# Altium PCB Keyboard_IDC_I2C.PcbDoc
Units mm, origin at the board's own origin, x right, y up, seen from the top; angles counter-clockwise.
Board outline 38.4 x 34.8 mm, 2 copper layers (Top Layer, Bottom Layer); 28 components, 25 nets, 92 pads, 63 vias.
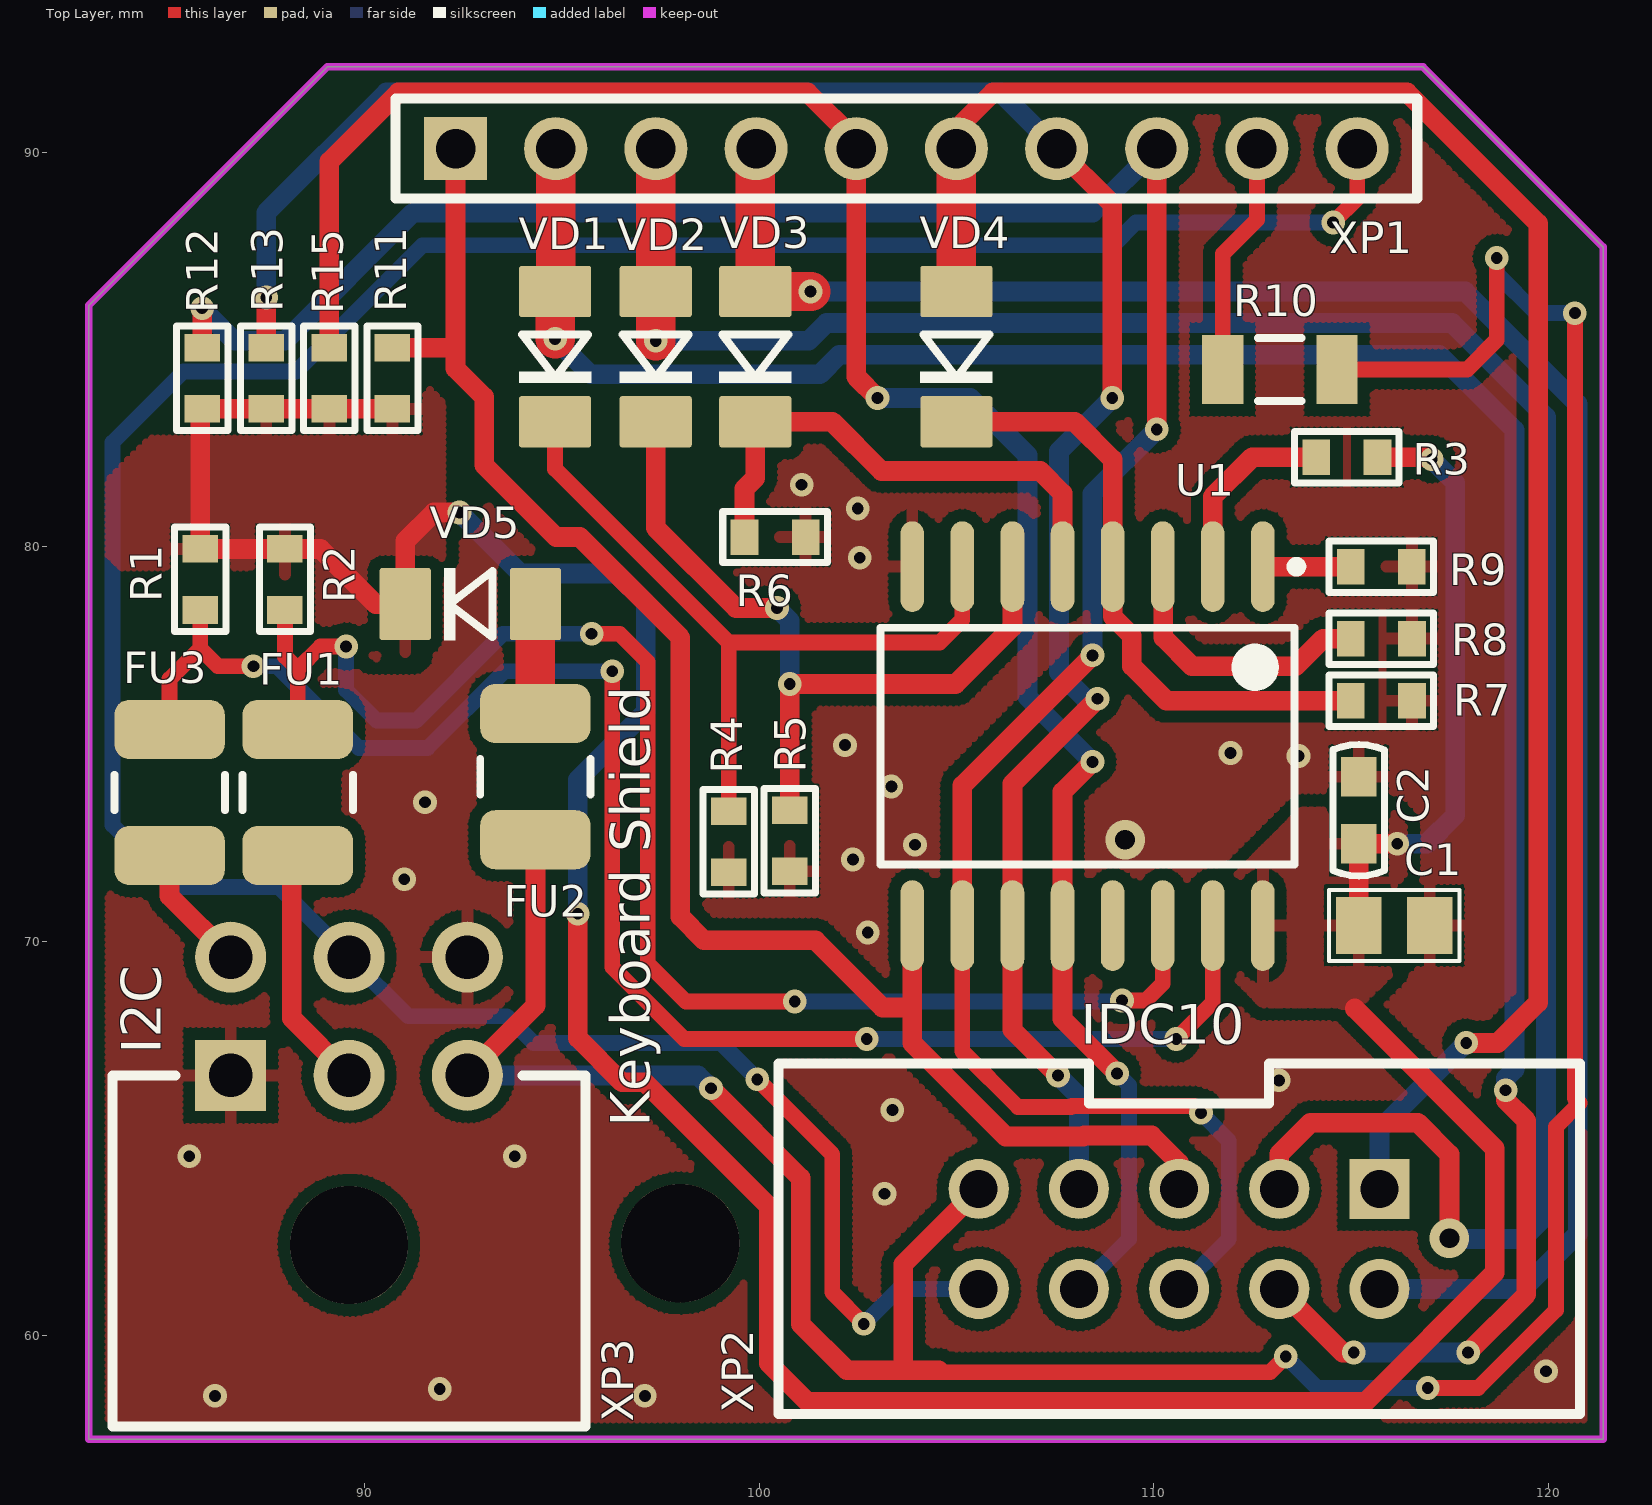
[diagram p0: Top Layer view]
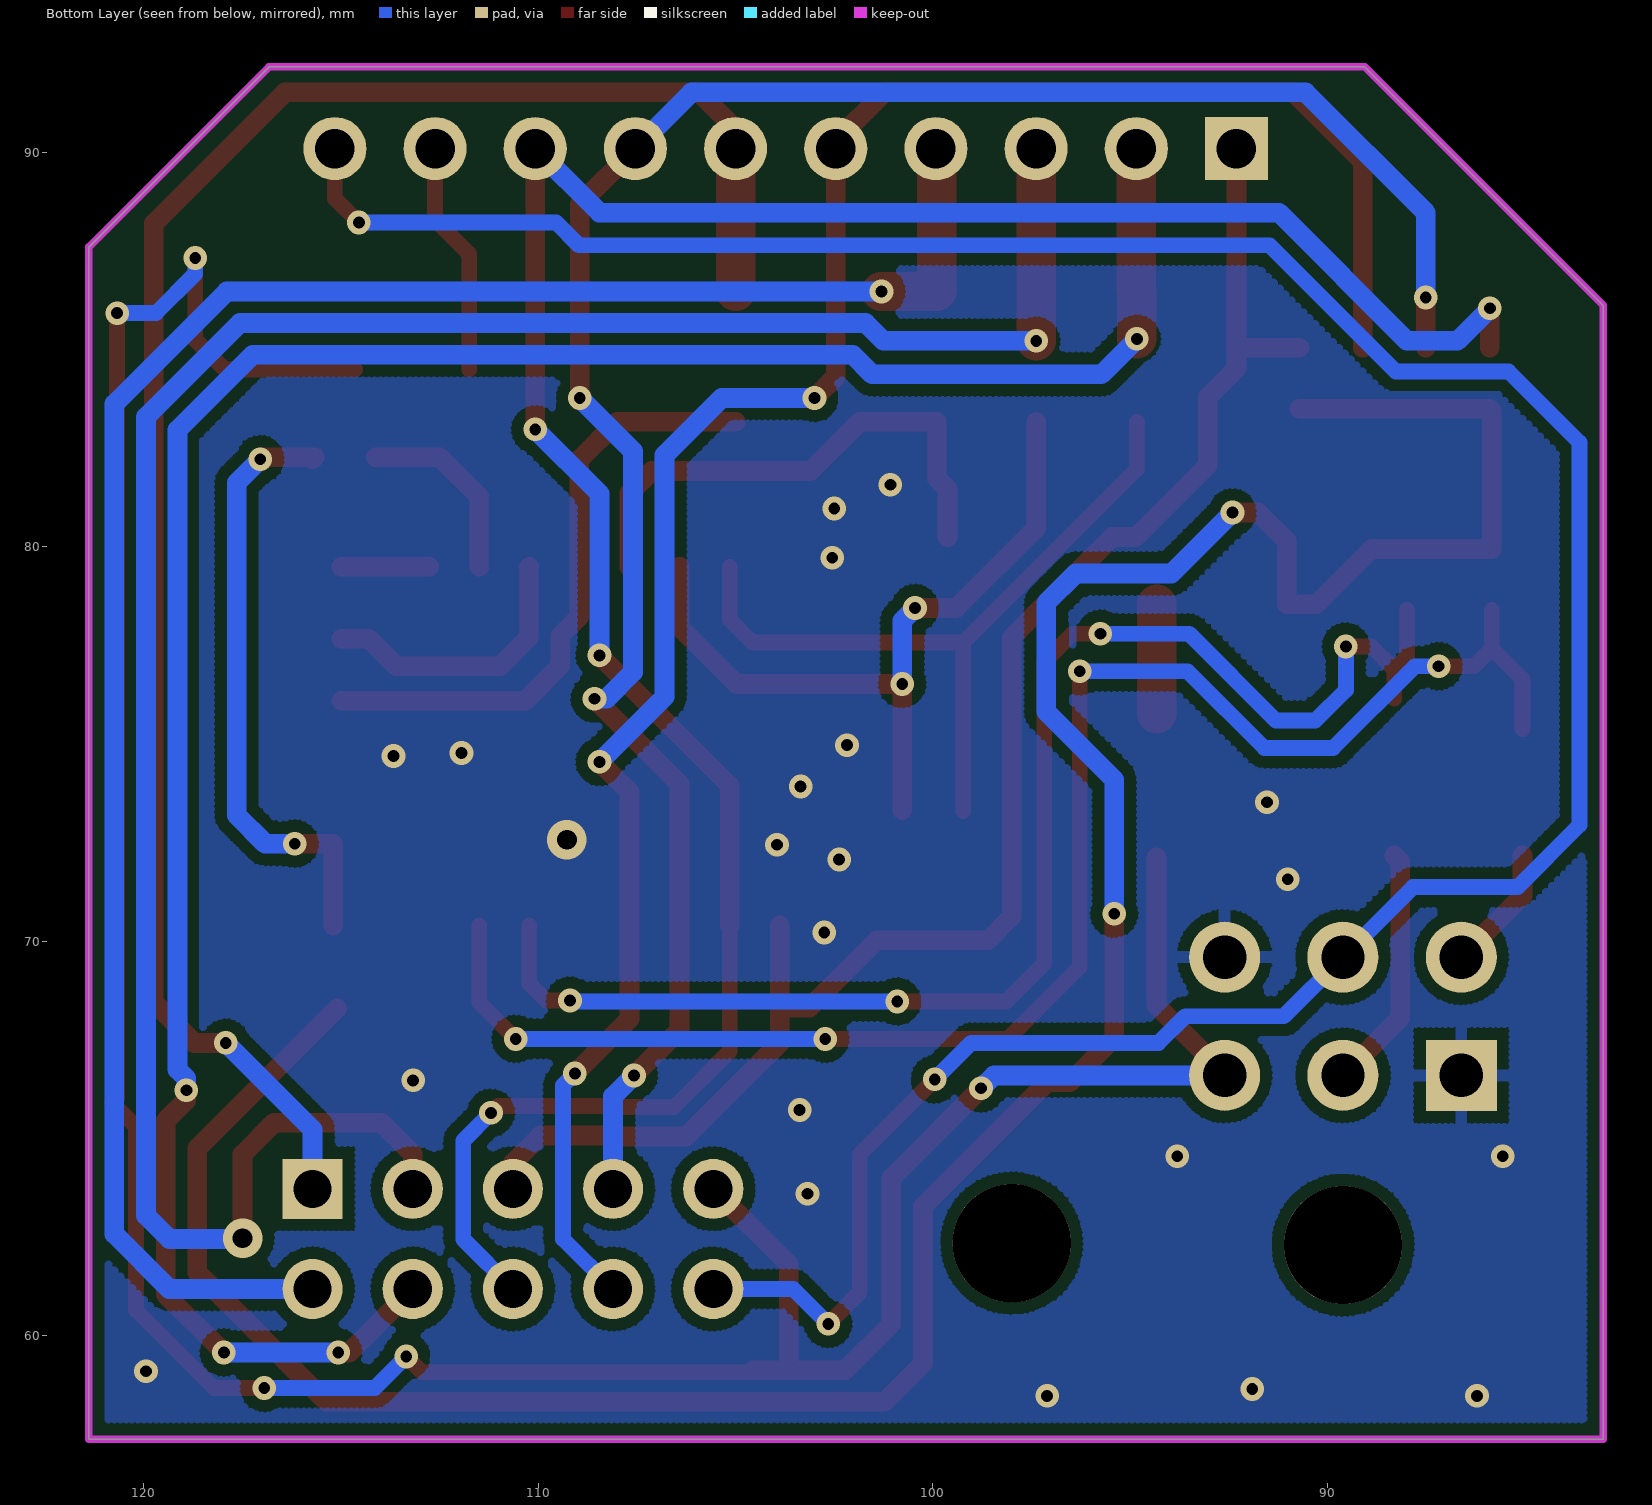
[diagram p1: Bottom Layer view, seen from below]

## Layer stack, top to bottom
Top Solder: solder mask 0.0102, Solder Resist, Dk 3.5
Top Layer: signal copper 0.0356
Dielectric 1: dielectric 0.32, FR-4, Dk 4.8
Bottom Layer: signal copper 0.0356
Bottom Solder: solder mask 0.0102, Solder Resist, Dk 3.5

## Board outline
83,57.375 83,86.125 89.05,92.175 116.825,92.175 121.4,87.6 121.4,57.375

## Design rules (kind name [scope] priority, off if disabled: settings)
Clearance [All] p1: gap=0.3 ignorepadtopadclearanceinfootprint=FALSE
HoleSize [All] p1: absolutevalues=TRUE maxlimit=10 minlimit=0.025 maxpercent=80.000 minpercent=20.000
PolygonConnect PolygonConnect_1 [All] p1: thpad.connectstyle=Relief thpad.reliefconductorwidth=0.3 thpad.reliefentries=4 thpad.polygonreliefangle="90 Angle" thpad.airgapwidth=0.3 smdpad.connectstyle=Relief smdpad.reliefconductorwidth=0.3 smdpad.reliefentries=4 smdpad.polygonreliefangle="90 Angle" smdpad.airgapwidth=0.3 via.connectstyle=Direct via.reliefconductorwidth=0.254 via.reliefentries=4 via.polygonreliefangle="90 Angle" via.airgapwidth=0.254
PolygonConnect [All] p2: connectstyle=Relief reliefconductorwidth=0.3 reliefentries=4 polygonreliefangle="90 Angle" airgapwidth=0.3
RoutingVias [All] p1: holewidth=0.4 width=0.8 viastyle="Through Hole" minholewidth=0.3 minwidth=0.6 maxholewidth=0.5 maxwidth=1
SolderMaskExpansion [All] p1: expansion=0.102
Width [All] p1: maxlimit=5 minlimit=0.2 preferedwidth=0.5
29 further rules are at their usual default settings.

## Components (designator, comment, footprint, x,y, rotation, side; value= is the part's Value field where it differs from the comment)
C1 "10uFx10V" CC0805 116.1,70.4 r180 top
C2 "0.1uF" CC0603 115.2,73.325 r270 top
FU1 "MICROSMD010F-2" RC1210 88.3,73.775 r90 top
FU2 "MICROSMD010F-2" RC1210 94.325,74.175 r90 top
FU3 "MICROSMD010F-2" RC1210 85.05,73.775 r90 top
R1 "n.p" RC0603 85.825,79.175 r90 top
R2 "n.p" RC0603 87.975,79.175 r90 top
R3 "10k" RC0603 114.9,82.275 r180 top
R4 "10k" RC0603 99.225,72.525 r90 top
R5 "10k" RC0603 100.775,72.55 r90 top
R6 "10k" RC0603 100.4,80.25 r180 top
R7 "10k" RC0603 115.775,76.1 r180 top
R8 "0E" RC0603 115.776,77.675 r0 top
R9 "0E" RC0603 115.775,79.5 r0 top
R10 "100E" RC1206 113.2,84.5 r0 top
R11 "10k" RC0603 90.7,84.275 r270 top
R12 "10k" RC0603 85.875,84.275 r270 top
R13 "10k" RC0603 87.5,84.275 r270 top
R15 "10k" RC0603 89.1,84.275 r270 top
U1 "PCF8574ADWR" DW16_N 108.325,74.95 r270 top
VD1 "LL4148" SOD-80 94.825,84.825 r90 top
VD2 "LL4148" SOD-80 97.375,84.825 r90 top
VD3 "LL4148" SOD-80 99.9,84.825 r90 top
VD4 "LL4148" SOD-80 105,84.825 r90 top
VD5 "LL4148" SOD-80 92.675,78.55 r0 top
XP1 "n.p" PLS-10 92.3,90.1 r0 top
XP2 "BH-10" BH-10 115.725,63.725 r180 top
XP3 "MIF2X03PRP" MIF2X03PRP 86.6,66.6 r270 top

## Footprints (in the part's own frame and the unit in brackets; to place one, negate y for a bottom-side part, rotate by r counter-clockwise, add the part's x,y. Pads: shape width x height; smd on the part's side, far side on the other; paste and mask are expansions set on the pad)
BH-10 [mil]
  rect 60x60 hole 38 mask+2.95: 1(0,0)
  round 60 hole 38 mask+2.95: 2(0,100) 3(100,0) 4(100,100) 5(200,0) 6(200,100) 7(300,0) 8(300,100) 9(400,0) 10(400,100)
  silkscreen extent -200,-125 600,225
CC0603 [mm]
  rect 1x0.9 smd paste-25.4 mask+0.075: 1(-0.85,0) 2(0.85,0)
  silkscreen extent -1.66,-0.65 1.66,0.65
CC0805 [mm]
  rect 1.15x1.45 smd paste-25.4 mask+0.075: 1(-0.9,0) 2(0.9,0)
  silkscreen extent -1.65,-0.9 1.65,0.9
DW16_N [mm] "SOIC, 16-Leads, Body 10.3x7.5mm, Pitch 1.27mm, IPC Medium Density"
  oval 2.3x0.6 smd mask+0.075: 1(-4.55,4.445) 2(-4.55,3.175) 3(-4.55,1.905) 4(-4.55,0.635) 5(-4.55,-0.635) 6(-4.55,-1.905) 7(-4.55,-3.175) 8(-4.55,-4.445) 9(4.55,-4.445) 10(4.55,-3.175) 11(4.55,-1.905) 12(4.55,-0.635) 13(4.55,0.635) 14(4.55,1.905) 15(4.55,3.175) 16(4.55,4.445)
  silkscreen extent -4.67,-5.25 3,5.42, body extent -3.79,-5.25 3.8,5.25, height 2.64
MIF2X03PRP [mm]
  rect 1.8x1.8 hole 1.1 mask+0.075: 1(0,0)
  round 1.8 hole 1.1 mask+0.075: 2(0,3) 3(0,6) 4(-3,0) 5(-3,3) 6(-3,6)
  round 3 hole 3 unplated mask+0.075: 7(4.3,3)
  silkscreen extent 0,-3 8.9,9
PLS-10 [mm]
  rect 1.6x1.6 hole 1 mask+0.075: 1(0,0)
  round 1.6 hole 1 mask+0.075: 2(2.54,0) 3(5.08,0) 4(7.62,0) 5(10.16,0) 6(12.7,0) 7(15.24,0) 8(17.78,0) 9(20.32,0) 10(22.86,0)
  silkscreen extent -1.52,-1.27 24.38,1.27
RC0603 [mm]
  rect 0.7x0.9 smd paste-25.4 mask+0.075: 1(-0.775,0) 2(0.774,0)
  silkscreen extent -1.32,-0.65 1.33,0.65
RC1206 [mm]
  rect 1.05x1.75 smd paste-25.4 mask+0.075: 1(-1.45,0) 2(1.45,0)
  silkscreen extent -0.55,-0.8 0.55,0.8
RC1210 [mm]
  rrect50% 1.5x2.8 smd mask+0.075: 1(-1.6,0) 2(1.6,0)
  silkscreen extent -0.45,-1.4 0.45,1.4
SOD-80 [mm]
  rrect10% 1.3x1.83 smd paste-25.4 mask+0.075: 1(1.651,0) 2(-1.651,0)
  silkscreen extent -0.66,-0.91 0.56,0.91

## Part data
C1: library part CC0805, "CC0805"
C2: library part CC0603, "CC0603"
FU1 FU2 FU3: library part MICROSMD, "MICROSMD"
R1 R2 R3 R4 R5 R6 R7 R8 R9 R11 R12 R13 R15: library part RC0603, "RC0603"
R10: library part RC1206, "RC1206"
U1: "Remote 8-Bit I/O Expander for I2C-Bus, 2.5 to 6.0 V, -40 to 85 degC, 16-pin SOIC (DW), Green (RoHS & no Sb/Br)", Manufacturer="Texas Instruments", Max Frequency(kHz)=100, Supplier Part Number 1=296-13105-2-ND, Voltage Nodes(V)="5, 3.3", # of I/Os=8, Code_JEDEC=MS-013-AA, ComponentLink1Description=Datasheet, ComponentLink1URL=http://www.ti.com/general/docs/lit/getliterature.tsp?genericPartNumber=PCF8574A&fileType=pdf, ComponentLink2Description="Package Specification", ComponentLink2URL=http://www.ti.com/litv/pdf/msoi003g, DatasheetVersion=SCPS069D, Eco-Plan="Green (RoHS & no Sb/Br)", fSCLK(Max)(MHz)=0.1, I2C Address="0111 xxx", Interrupt Output=Yes, Mounting Technology="Surface Mount", PackageDescription="16-Pin Small Outline Integrated Circuit, 10.3 x 7.5 mm, Pitch 1.27 mm Pitch", PackageReference=DW16, PackageVersion="revG, Jan-2011", PartNumber=PCF8574ADWR, Push-Pull I/O Type=Yes, Reset Input=No, SubFamily="I2C IO Expander", Supplier 1=Digi-Key, Supplier 2=Digi-Key, Supplier 3=Digi-Key, Supplier 4=Newark, Supplier 5=Mouser, Supplier Part Number 2=296-13105-1-ND, Supplier Part Number 3=296-13105-6-ND, Supplier Part Number 4=75C5233, Supplier Part Number 5=595-PCF8574ADWR, VCC(Max)(V)=6, VCC(Min)(V)=2.5, Vcc range(V)="2.5 to 6.0"
XP1: library part PLS-10, "PLS-10"

## Free pads (board coordinates)
  round 3 hole 3 unplated mask+0.075: 0(98,62.346)

## Via types
v1: diameter 0.6, hole 0.3, Top Layer to Bottom Layer, 61 vias
v2: diameter 1, hole 0.5, Top Layer to Bottom Layer, 2 vias

## Nets (pads, with @x,y where several pads share a name; then routed paths per layer and width w, separated by ;. In a path a pad name is that pad's centre, name@x,y a point inside that pad or via, vN(x,y) a via of type N, cw(c..) or ccw(c..) an arc to the next point about the centre after c; other vN are vias at no path point)
COL1: R7.2 U1.4 VD4.2 | length 15.7
  Top Layer w0.5: VD4.2 108.001,83.174 108.96,82.215 U1.4 108.96,78.234 109.447,77.747 109.447,76.978 110.325,76.1 R7.2
COL2: R6.2 U1.5 VD3.2 | length 13.4
  Top Layer w0.5: R6.2 99.626,81.476 99.9,81.75 VD3.2 101.851,83.174 103.1,81.925 107.125,81.925 107.69,81.36 U1.5
COL3: R5.2 U1.6 VD2.2 | length 19.6
  Top Layer w0.5: VD2.2 97.375,80.486 99.411,78.45 v1(100.45,78.45) ; R5.2 v1(100.775,76.525) 104.975,76.525 106.42,77.97 U1.6
  Bottom Layer w0.5: v1(100.45,78.45) 100.775,78.125 v1(100.775,76.525)
COL4: R4.2 U1.7 VD1.2 | length 19.2
  Top Layer w0.4: VD1.2 94.825,81.975 99.225,77.575 ; R4.2 99.225,77.575 ; U1.7 105.15,78.15 104.575,77.575 99.225,77.575
GND: C1.1 C2.1 R4.1 R5.1 R6.1 R7.1 R8.2 R9.2 U1.8 XP3.1 XP3.6
  other v1: 86.2,58.475 97.1,58.475 91.9,58.65 119.95,59.1 103.175,63.6 85.55,64.55 93.8,64.55 103.375,65.725 113.175,66.475 102.75,70.225 91,71.575 102.375,72.075 103.95,72.45 91.525,73.525 103.35,73.925 113.675,74.7 111.95,74.775 102.175,74.975 102.55,79.725 102.5,80.975 101.075,81.575
  other v2: 109.275,72.575
NetFU1_1: FU1.1 XP3.2 | length 6.2
  Top Layer w0.5: FU1.1 88.15,72.025 88.15,68.05 XP3.2
NetFU1_2: FU1.2 R2.1 U1.14 | length 36.9
  Top Layer w0.4: R2.1 87.975,77.225 88.3,76.9 ; 88.3,76.15 88.3,76.9 ; v1(89.525,77.475) 88.875,77.475 88.3,76.9 ; v1(95.75,77.8) 96.456,77.8 97.175,77.081 97.175,69.44 98.14,68.475 v1(100.9,68.475) ; v1(109.2,68.5) 109.8,68.5 110.23,68.93 U1.14
  Bottom Layer w0.4: v1(89.525,77.475) 89.525,76.375 90.3,75.6 91.3,75.6 93.5,77.8 v1(95.75,77.8) ; v1(100.9,68.475) 109.175,68.475 v1(109.2,68.5)
NetFU2_2: FU2.2 VD5.1 | length 2.8
  Top Layer w1: FU2.2 VD5.1 ; VD5.1 VD5.1
NetFU3_1: FU3.1 XP3.4 | length 3.2
  Top Layer w0.5: FU3.1 85.05,71.15 XP3.4
NetFU3_2: FU3.2 R1.1 U1.15 | length 41.5
  Top Layer w0.4: FU3.2 85.05,76.65 85.825,77.425 ; R1.1 85.825,77.425 ; v1(87.175,76.975) 86.275,76.975 85.825,77.425 ; v1(96.275,76.85) 96.275,69.35 98.1,67.525 v1(102.725,67.525) ; v1(110.575,67.525) 111.5,68.45 U1.15
  Bottom Layer w0.4: v1(87.175,76.975) 87.775,76.975 89.85,74.9 91.59,74.9 93.54,76.85 v1(96.275,76.85) ; v1(102.725,67.525) v1(110.575,67.525)
NetR3_2: R3.2 U1.2 | length 4.8
  Top Layer w0.5: U1.2 111.5,81.275 112.5,82.275 R3.2
NetR8_1: R8.1 U1.3 | length 7.1
  Top Layer w0.5: U1.3 110.247,79.483 110.247,77.703 110.975,76.975 113.6,76.975 114.3,77.675 R8.1
NetR9_1: R9.1 U1.1 | length 2.2
  Top Layer w0.5: U1.1 R9.1
NetR10_1: R10.1 XP1.9 | length 6
  Top Layer w0.4: R10.1 111.75,87.425 112.62,88.295 XP1.9
NetVD1_1: VD1.1 XP1.2 XP2.4 | length 60.3
  Top Layer w0.5: XP1.2@94.825,90.085 XP1.2 ; XP2.4 114.795,59.575 v1(115.075,59.575) ; v1(117.975,59.575) 119.45,61.05 119.45,65.45 118.925,65.975 v1(118.925,66.225)
  Top Layer w1: v1(94.825,85.275) VD1.1 94.84,86.491 XP1.2
  Bottom Layer w0.5: v1(94.825,85.275) 95.725,84.375 101.533,84.375 102.034,84.876 117.236,84.876 119.15,82.962 119.15,66.75 118.925,66.525 v1(118.925,66.225) ; v1(115.075,59.575) v1(117.975,59.575)
NetVD2_1: VD2.1 XP1.3 XP2.3 | length 59.6
  Top Layer w0.5: XP2.3 113.185,64.61 113.975,65.4 116.7,65.4 117.5,64.6 v2(117.5,62.475)
  Top Layer w1: v1(97.375,85.225) VD2.1 97.375,90.095 XP1.3
  Bottom Layer w0.5: v1(97.375,85.225) 101.252,85.225 101.703,85.676 117.568,85.676 119.95,83.294 119.95,63.05 119.35,62.45 v2@117.475,62.45
NetVD3_1: VD3.1 XP1.4 XP2.2 | length 52.3
  Top Layer w1: XP1.4 99.9,90.08 VD3.1 v1(101.301,86.476)
  Bottom Layer w0.5: v1(101.301,86.476) 117.899,86.476 120.75,83.625 120.75,62.575 119.36,61.185 XP2.2
NetVD4_1: VD4.1 XP1.6 XP2.1 | length 47.2
  Top Layer w0.5: XP1.6 105,90.6 105.925,91.525 116.425,91.525 119.75,88.2 119.75,68.45 118.725,67.425 v1(117.925,67.425)
  Top Layer w1: VD4.1 XP1.6
  Bottom Layer w0.5: XP2.1 115.725,65.225 v1(117.925,67.425)
NetXP1_10: XP1.10 XP2.10 XP3.5 | length 74.7
  Top Layer w0.4: v1(99.95,66.5) 101.85,64.6 101.85,61.1 v1(102.65,60.3) ; v1(114.55,88.225) 115.16,88.835 XP1.10
  Bottom Layer w0.4: v1(99.95,66.5) 99.025,67.425 94.275,67.425 93.6,68.1 91.1,68.1 XP3.5 87.825,71.375 85.175,71.375 83.6,72.95 83.6,82.65 85.4,84.45 88.26,84.45 91.461,87.65 108.975,87.65 109.55,88.225 v1(114.55,88.225) ; v1(102.65,60.3) 103.535,61.185 XP2.10
ROW1: R11.1 U1.9 XP1.1 XP2.5 | length 42.3
  Top Layer w0.5: R11.1 92.3,85.05 ; XP1.1 92.3,85.05 ; U1.9 103.88,68.325 ; XP2.5 110.645,64.38 109.95,65.075 108.242,65.075 108.217,65.05 106.25,65.05 103.88,67.42 103.88,68.325 ; 92.3,85.05 92.3,84.525 93.025,83.8 93.025,82.075 94.85,80.25 95.45,80.25 98,77.7 98,70.625 98.6,70.025 101.427,70.025 103.127,68.325 103.88,68.325
ROW2: R12.1 U1.10 XP1.8 XP2.6 | length 64.5
  Top Layer w0.4: U1.10 105.15,67.211 106.561,65.8 107.906,65.8 107.931,65.825 111.025,65.825 v1(111.2,65.65)
  Top Layer w0.5: R12.1 v1(85.875,86.05) ; U1.10 105.15,73.95 v1(108.45,77.25) ; v1(110.08,82.98) XP1.8
  Bottom Layer w0.4: XP2.6 111.907,62.447 111.907,64.943 v1(111.2,65.65)
  Bottom Layer w0.5: v1(85.875,86.05) 86.7,85.225 87.975,85.225 91.225,88.475 108.455,88.475 XP1.8 ; v1(108.45,77.25) 108.45,81.35 v1(110.08,82.98)
ROW3: R13.1 U1.11 XP1.7 XP2.7 | length 55
  Top Layer w0.5: R13.1 v1(87.5,86.325) ; XP1.7 108.95,88.69 v1(108.95,83.775) ; v1(107.575,66.6) 106.42,67.755 U1.11 106.42,73.995 v1(108.575,76.15)
  Bottom Layer w0.5: v1(87.5,86.325) 87.5,88.475 90.55,91.525 106.115,91.525 XP1.7 ; v1(107.575,66.6) 108.105,66.07 XP2.7 ; v1(108.575,76.15) 108.275,76.15 107.6,76.825 107.6,82.425 v1(108.95,83.775)
ROW4: R15.1 U1.12 XP1.5 XP2.8 | length 53.8
  Top Layer w0.5: R15.1 89.1,89.775 90.85,91.525 101.225,91.525 102.46,90.29 XP1.5 102.46,84.315 v1(103,83.775) ; v1(108.45,74.55) 107.69,73.79 U1.12 107.69,68.035 v1(109.075,66.65)
  Bottom Layer w0.4: XP2.8 109.375,62.455 109.375,66.35 v1(109.075,66.65)
  Bottom Layer w0.5: v1(103,83.775) 105.35,83.775 106.8,82.325 106.8,76.2 v1(108.45,74.55)
VIN: FU2.1 R10.2 XP2.9 XP3.3 | length 80.7
  Top Layer w0.4: 104.5,59.125 104.55,59.075 112.95,59.075 v1(113.35,59.475) ; R10.2 117.95,84.5 118.7,85.25 v1(118.7,87.325) ; v1(116.95,58.675) 118.225,58.675 120.2,60.65 120.2,62.75 120.2,65.3 120.8,65.9 120.681,66.019 v1(120.681,85.929)
  Top Layer w0.5: XP3.3@92.6,66.65 94.325,68.375 FU2.1@94.325,72.125 ; v1(98.775,66.275) 101.05,64 101.05,60.3 102.225,59.125 103.65,59.125 ; 104.55,59.125 104.5,59.125 103.65,59.125 ; XP2.9 103.65,61.81 103.65,59.125
  Bottom Layer w0.4: v1(113.35,59.475) 114.15,58.675 v1(116.95,58.675) ; v1(118.7,87.325) 118.7,86.925 119.696,85.929 v1(120.681,85.929) v1@120.704,85.929
  Bottom Layer w0.5: XP3.3 98.45,66.6 v1(98.775,66.275)
VIN_F: C1.2 C2.2 R1.2 R2.2 R3.1 R11.2 R12.2 R13.2 R15.2 U1.16 VD5.2 | length 89.4
  Top Layer w0.5: R11.2 R15.2 R13.2 R12.2 85.825,83.451 R1.2 R2.2 88.876,79.949 90.275,78.55 VD5.2 91.024,80.149 91.75,80.875 v1(92.4,80.875) ; v1(95.4,70.7) 95.4,67.55 96.525,66.425 97.1,66.425 100.25,63.275 100.25,59.3 101.225,58.325 115.375,58.325 118.65,61.6 118.65,64.75 115.101,68.299 ; C1.2 C2.2 v1(116.175,72.475) ; R3.1@115.725,82.225 R3.1 117,82.275 v1(117.05,82.225)
  Bottom Layer w0.5: v1(92.4,80.875) 93.95,79.325 96.375,79.325 97.125,78.575 97.125,75.825 95.4,74.1 v1(95.4,70.7) ; v1(116.175,72.475) 116.925,72.475 117.65,73.2 117.65,81.625 v1(117.05,82.225)
pads on no net: U1.13 XP3.7

## Polygon pours and split planes (outlines as drawn)
VIN_F on Top Layer "NONET_L-01_P-001" (hatched 90Degree grid 0.2 track 0.5, remove dead copper, pour order 14): 115.3,68.975 114.8,68.475 112.8,68.475 112.05,69.225 112.05,72.2 113.125,73.275 115.925,73.275 116.35,72.85 116.35,71.8 116.05,71.5 116.05,69.225 115.8,68.975
GND on Top Layer "GND_L01_P010" (hatched 90Degree grid 0.15 track 0.2, remove dead copper, pour order 10): 83,57.375 83,86.125 89.05,92.175 116.825,92.175 121.4,87.6 121.4,57.375
VIN_F on Top Layer "VIN_F_L01_P008" (hatched 90Degree grid 0.15 track 0.2, remove dead copper, pour order 8): 85.95,82.751 84.551,82.751 83.425,81.625 83.425,79.875 83.825,79.475 87.425,79.475 88.05,80.1
VIN_F on Top Layer "VIN_F_L01_P002" (hatched 90Degree grid 0.15 track 0.2, remove dead copper, pour order 2): 112.125,71.7 113.75,73.325 116,73.325 116.35,72.975 116.35,71.675 116.075,71.4 116.075,69.25 115.225,68.4 112.75,68.4 112.125,69.025
VIN_F on Top Layer "VIN_F_L01_P000" (hatched 90Degree grid 0.15 track 0.2, remove dead copper, pour order 0): 85.2,84.125 91.5,84.125 91.975,83.65 91.975,77.9 91.25,77.175 88.8,77.175 88.05,77.925 88.05,80.25 85.175,83.125 85.175,83.75
GND on Bottom Layer "GND_L02_P012" (hatched 90Degree grid 0.15 track 0.2, remove dead copper, pour order 12): 83,57.375 83,86.125 89.05,92.175 116.825,92.175 121.4,87.6 121.4,57.375

## Keep-outs
Keep-Out Layer:
  the board outline again, w0.2

## Other copper
Top Layer:
  pour cut-out: 83.838,74.475 86.262,74.475 86.262,73.1 83.838,73.1
  pour cut-out: 87.075,74.475 89.5,74.475 89.5,73.1 87.075,73.1
  pour cut-out: 92.75,75.375 95.875,75.375 95.875,72.975 92.75,72.975

## Silkscreen, mask and mechanical layers (free items; w line width, h text height)
Top Overlay:
  text "IDC10" at 108.15,67.4 h1
  text "I2C" at 84.825,67.15 h1 r90
  text "Keyboard Shield" at 97.225,65.3 h1 r90
Mechanical 1:
  lines w0.2: 124.35,87.35 129.9,87.35 129.875,87.35 129.85,87.35 ; 125.775,67.3 123.15,67.3 123.15,74.475 125.85,74.475 ; 125.85,59.475 123.225,59.475 123.225,66.65 125.925,66.65 ; 125.85,75.275 123.225,75.275 123.225,82.45 125.925,82.45 ; 126.875,83.9 130.35,83.9 ; 128.85,86.35 129.85,87.35 ; 128.85,88.35 129.85,87.35 ; 125.925,58.275 127.775,58.275 127.775,85.1 125.925,85.1 125.925,58.275
  text "К плате необходимо припаять разъем клавиатуры." at 78.925,96.1 h2
  text "Плата должна быть расположена разъемом XP2 от клавиатуры" at 73.2,93.85 h2
  text "A" at 125.175,87.75 h3
  text "A" at 78.8,71.175 h3